# EAGLE board openSX70-dongle_v2-9 (EAGLE 8.5.1)
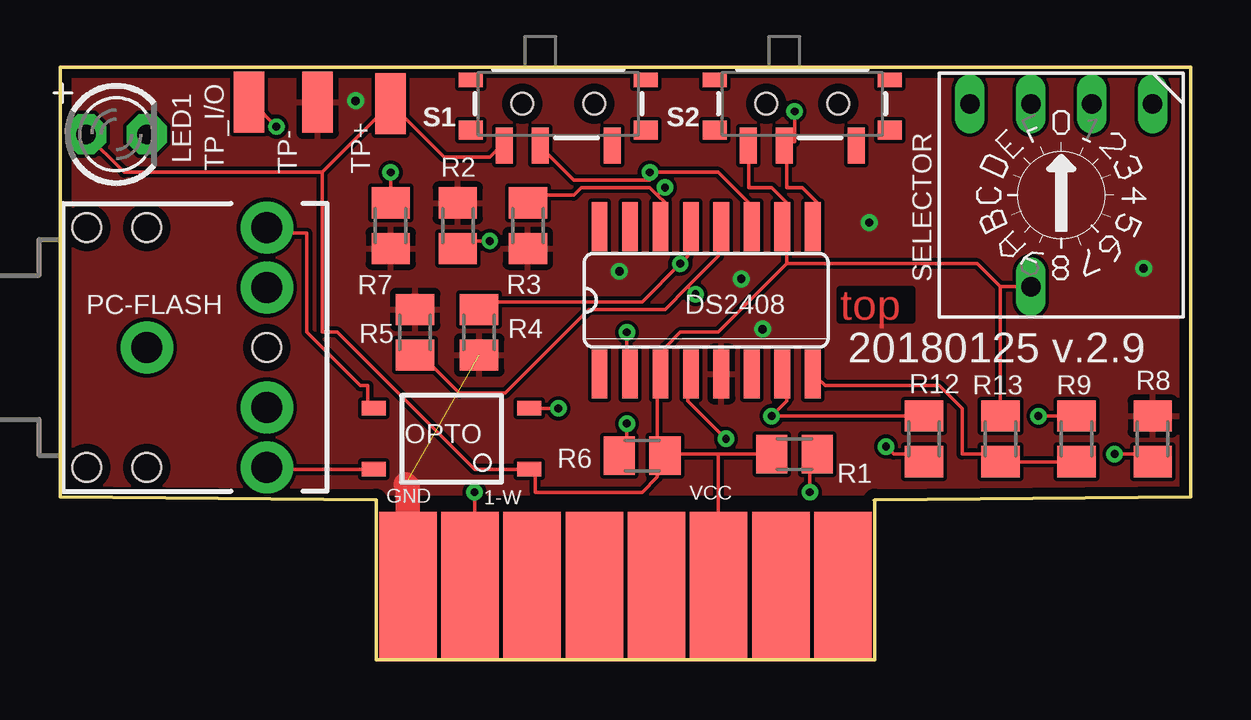
[diagram p0: board, top side]
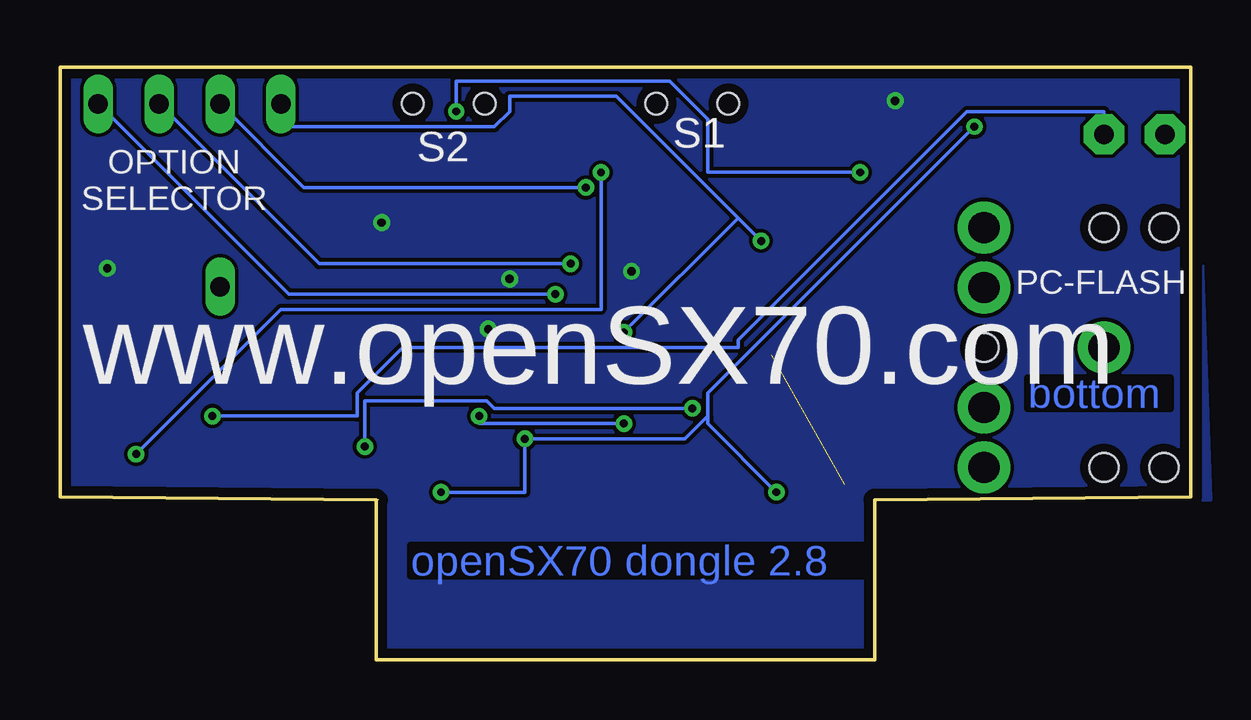
[diagram p1: board, bottom side, seen from below]

Size 47.12 x 24.71 mm. Coordinates in mm from the lower left corner, seen from the top.
Outline: 33.84,6.68 33.95,6.68
Outline: 33.95,6.68 33.95,0 13.17,0 13.17,6.68 0,6.81 0,24.71 47.12,24.71 47.12,6.81 33.95,6.68
Copper layers (1*16): Top 0.0356mm / dielectric 1.5011mm / Bottom 0.0356mm
Design rules "oshpark-2layer": minimum track width 6mil, minimum drill 13mil, track to track 6mil, track to pad 6mil, pad to pad 6mil, via to via 6mil, smd to smd 6mil, copper to edge 15mil, drill to drill 6mil, minimum pad ring 7mil, minimum via ring 7mil, stop-mask expansion 2.5mil, vias tented up to drill 0mil, thermal gap 10mil

## Footprints (pad centres in the part's own frame; a part is rotated, then mirrored left to right if it is on the bottom)
SO16 = smd 0.66 x 2.032: 1 -4.445,-3.073; 2 -3.175,-3.073; 3 -1.905,-3.073; 4 -0.635,-3.073; 5 0.635,-3.073; 6 1.905,-3.073; 7 3.175,-3.073; 8 4.445,-3.073; 9 4.445,3.073; 10 3.175,3.073; 11 1.905,3.073; 12 0.635,3.073; 13 -0.635,3.073; 14 -1.905,3.073; 15 -3.175,3.073; 16 -4.445,3.073
LED3MM = drill 0.813 pad 1.676 octagon: A -1.27,0; K 1.27,0
SO-4 = smd 1 x 0.6: 1 -3.24,0.635; 2 -3.24,-1.905; 3 3.24,-1.905; 4 3.24,0.635
AUDIO-JACK = drill 1.3 pad 2.184: RING 5,5; RSH 5,2.5; SLEEVE 0,0; TIP 5,-5; TSH 5,-2.5 | hole 1.2: 0,5; -2.5,5; -2.5,-5; 0,-5; 5,0
M0805 = smd 1.3 x 1.6: 1 -0.95,0; 2 0.95,0
SWITCH_SPST_SMD_A = smd 0.7 x 1.5: 1 -2.25,-1.75; 2 -0.75,-1.75; 3 2.25,-1.75 | smd 1 x 0.6: GND1 -3.65,1; GND3 3.65,1 | smd 1 x 0.8: GND2 -3.65,-1.1; GND4 3.65,-1.1 | hole 0.9: -1.5,0; 1.5,0
SW-C16 = drill 0.813 long: 1 -3.81,-3.81; 2 -1.27,-3.81; 4 1.27,-3.81; 8 3.81,-3.81; C 1.27,3.81
SMD1,27-2,54 = smd 1.27 x 2.54: 1 0,0
FLASH-EDGE-8 = smd 2.4 x 6.09: P$1 -9.065,0; P$2 -6.475,0; P$3 -3.885,0; P$4 -1.295,0; P$5 1.295,0; P$6 3.885,0; P$7 6.475,0; P$8 9.065,0

## Placement (x,y rotation side)
DS2408  DS2408  [SO16]  26.92,15 0 top
LED1  [LED3MM]  2.35,21.92 0 top
OPTO  TLP127  [SO-4]  16.32,8.59 180 top
PC-FLASH  AUDIO_JACK_3.5MM_PTH  [AUDIO-JACK]  3.62,13.03 0 top
R1  4K7  [M0805]  30.61,8.59 180 top
R2  100K  [M0805]  16.57,18.11 90 top
R3  100K  [M0805]  19.49,18.11 90 top
R4  100K  [M0805]  17.46,13.67 90 top
R5  100K  [M0805]  14.8,13.67 270 top
R6  100K  [M0805]  24.26,8.52 0 top
R7  100K  [M0805]  13.78,18.11 270 top
R8  100K  [M0805]  45.53,9.22 90 top
R9  220R  [M0805]  42.35,9.22 90 top
R12  220R  [M0805]  36,9.22 270 top
R13  100K  [M0805]  39.18,9.22 90 top
S1  [SWITCH_SPST_SMD_A]  20.76,23.19 0 top
S2  [SWITCH_SPST_SMD_A]  30.92,23.19 0 top
SELECTOR  [SW-C16]  41.72,19.38 180 top
TP+  [SMD1,27-2,54]  13.78,23.19 0 top
TP-  [SMD1,27-2,54]  10.73,23.25 0 top
TP_I/O  [SMD1,27-2,54]  7.87,23.25 0 top
U$1  FLASH-EDGE-CONNECTOR  [FLASH-EDGE-8]  23.56,3.12 0 top

## Library data of the parts
DS2408 = DS2408-joaco
LED1 = adafruit
OPTO = openSX70
PC-FLASH = SparkFun-Connectors; PROD_ID: CONN-08774; SF_ID: PRT-08032
R1-R9 R12 R13 = rcl
S1 S2 = SparkFun-Switches; PROD_ID: SWCH-10651; SF_SKU: COM-10860
SELECTOR = special
TP+ TP- TP_I/O = wirepad
U$1 = SX70-flash

## Nets
GND: DS2408.5 R2.2 R3.1 R4.1 R5.1 R7.2 R8.2 TP-.1 U$1.P$1
N$1: DS2408.4 R1.1 TP_I/O.1 U$1.P$2
N$2: LED1.K R9.2
N$3: DS2408.2 R2.1 SELECTOR.8
N$4: DS2408.14 R3.2 SELECTOR.4
N$5: DS2408.13 R4.2 SELECTOR.2
N$6: DS2408.11 R8.1 S1.2
N$7: DS2408.9 R7.1 S2.2
N$8: DS2408.8 R9.1 R13.1
N$10: OPTO.2 R12.2
N$11: DS2408.7 R6.1 R12.1
N$12: OPTO.4 PC-FLASH.TIP
N$13: DS2408.12 R5.2 SELECTOR.1
N$15: OPTO.3 PC-FLASH.RING
VCC: DS2408.3 DS2408.10 LED1.A OPTO.1 R1.2 R6.2 R13.2 S1.1 S2.1 SELECTOR.C TP+.1 U$1.P$6

## Tracks (layer width: path | path; a pad name or v marks a point on that pad's centre or on a via)
GND  (via drill 0.35)  (1 unrouted)
  Top 1.016: U$1.P$1 14.49,7.24 14.41,7.32
  other vias: 23.3,16.21 28.38,15.89 29.27,13.79 12.32,23.32 33.72,18.24 45.15,16.33
  pour Bottom (isolate 0.152): -0.19,25.1 -0.83,6.68 13.14,6.68 13.14,0.01 34.1,0.01 34.1,6.68 47.43,6.68 47.43,25.1
  pour Top (isolate 0.152): -0.19,25.1 -0.19,6.68 13.14,6.68 13.21,6.93 34.16,6.93 34.1,6.68 47.43,6.68 47.43,25.1
N$1  (via drill 0.33)
  Top 0.152: v31.24,7 31.24,8.59 R1.1 | v27.75,9.22 26.16,10.81 26.16,11.76 DS2408.4 | v9.02,22.24 8.06,23.19 TP_I/O.1 | v17.27,7 17.27,3.19 U$1.P$2
  Bottom 0.152: v31.24,7 27.75,7 v27.75,9.22 21.08,9.22 20.13,10.17 | v9.02,22.24 20.13,11.13 20.13,10.17 | v17.27,7 20.13,9.86 20.13,10.17
N$2  (via drill 0.33)
  Top 0.152: v40.77,10.17 R9.2
  Bottom 0.152: v40.77,10.17 34.73,10.17 34.73,11.13 32.83,13.03 18.86,13.03 18.86,13.35 9.33,22.87 3.62,22.87 LED1.K
N$3  (via drill 0.33)
  Top 0.152: v17.91,17.48 16.64,17.48 R2.1 | v23.62,13.67 23.62,12.08 DS2408.2
  Bottom 0.152: 18.86,18.43 23.94,23.51 28.38,23.51 28.38,22.87 29.02,22.24 37.91,22.24 SELECTOR.8 | 18.86,18.43 v17.91,17.48 | 18.86,18.43 v23.62,13.67
N$4  (via drill 0.33)
  Top 0.152: 24.89,19.38 25.21,19.06 25.21,18.11 DS2408.14 | 24.89,19.38 24.57,19.7 21.72,19.7 21.4,19.38 19.81,19.38 R3.2 | 24.89,19.38 v25.21,19.7
  Bottom 0.152: SELECTOR.4 36.96,19.7 v25.21,19.7
N$5  (via drill 0.33)
  Top 0.152: R4.2 17.59,14.62 17.91,14.94 24.26,14.94 v25.84,16.52 26.16,16.84 26.16,17.79 DS2408.13
  Bottom 0.152: SELECTOR.2 36.32,16.52 v25.84,16.52
N$6  (via drill 0.33)
  Top 0.152: 24.89,20.33 24.57,20.02 21.4,20.02 20.13,21.29 S1.2 | 24.89,20.33 27.43,20.33 28.7,19.06 28.7,18.11 DS2408.11 | v43.94,8.59 45.53,8.59 R8.1 | 24.89,20.33 v24.57,20.33
  Bottom 0.152: v43.94,8.59 37.91,14.62 24.57,14.62 v24.57,20.33
N$7  (via drill 0.33)
  Top 0.152: DS2408.9 31.56,18.11 31.56,19.06 30.92,19.7 30.29,19.7 30.29,21.29 S2.2 30.29,21.6 30.61,21.6 v30.61,22.87 | v13.78,20.33 R7.1
  Bottom 0.152: v13.78,20.33 20.13,20.33 20.13,22.56 21.72,24.14 30.61,24.14 v30.61,22.87
N$8
  Top 0.152: R9.1 R13.1 39.18,8.59 37.59,8.59 37.59,10.49 36.64,11.44 31.88,11.44 31.56,11.76 DS2408.8
N$10  (via drill 0.33)
  Top 0.152: v20.76,10.49 OPTO.2 | v34.42,8.9 34.73,8.59 36,8.59 R12.2
  Bottom 0.152: v20.76,10.49 29.02,10.49 29.34,10.81 34.42,10.81 v34.42,8.9
N$11  (via drill 0.33)
  Top 0.152: v23.62,9.86 23.62,8.59 R6.1 | DS2408.7 30.29,11.76 30.29,10.81 v29.65,10.17 R12.1
  Bottom 0.152: v23.62,9.86 29.65,9.86 v29.65,10.17
N$12
  Top 0.152: OPTO.4 8.7,7.95 PC-FLASH.TIP
N$13  (via drill 0.33)
  Top 0.152: 26.16,15.57 27.43,16.84 27.43,17.79 DS2408.12 | 26.16,15.57 25.21,14.62 22.03,14.62 18.54,11.13 16.64,11.13 15.05,12.71 R5.2 | 26.16,15.57 v26.48,15.25
  Bottom 0.152: SELECTOR.1 37.59,15.25 v26.48,15.25
N$15
  Top 0.152: OPTO.3 12.83,10.49 12.83,11.44 12.51,11.44 10.29,13.67 10.29,17.79 8.7,17.79 PC-FLASH.RING
VCC
  Top 0.152: S2.1 28.7,21.29 28.7,19.7 29.65,19.7 30.29,19.06 30.29,18.11 DS2408.10 30.29,17.79 30.29,16.52 | 39.18,15.57 R13.2 | SELECTOR.C 39.18,15.57 | 30.29,16.52 38.23,16.52 39.18,15.57 | S1.1 18.22,21.29 17.91,20.97 16,20.97 TP+.1 10.92,20.33 | LED1.A 2.67,20.33 10.92,20.33 | R6.2 24.89,8.27 24.89,7.63 24.26,7 19.81,7 19.81,7.95 OPTO.1 17.27,7.95 11.56,13.67 10.92,13.67 10.92,20.33 | 27.43,8.59 25.21,8.59 R6.2 | 27.43,8.59 R1.2 | R6.2 24.89,8.59 24.89,11.76 DS2408.3 25.21,12.08 25.21,13.03 25.84,13.67 27.43,13.67 30.29,16.52 | 27.43,8.59 27.43,3.19 U$1.P$6

## Text on the board
Top: top
Bottom: bottom | openSX70 dongle 2.8
tPlace: 20180125 v.2.9
bPlace: www.openSX70.com
tNames: VCC | GND | 1-W
bNames: S1 | S2 | OPTION / SELECTOR | PC-FLASH